# Altium PCB pcb.PcbDoc
Units mm, origin at the board's own origin, x right, y up, seen from the top; angles counter-clockwise.
Board outline 53 x 61 mm, 2 copper layers (Top Layer, Bottom Layer); 50 components, 65 nets, 252 pads, 53 vias.
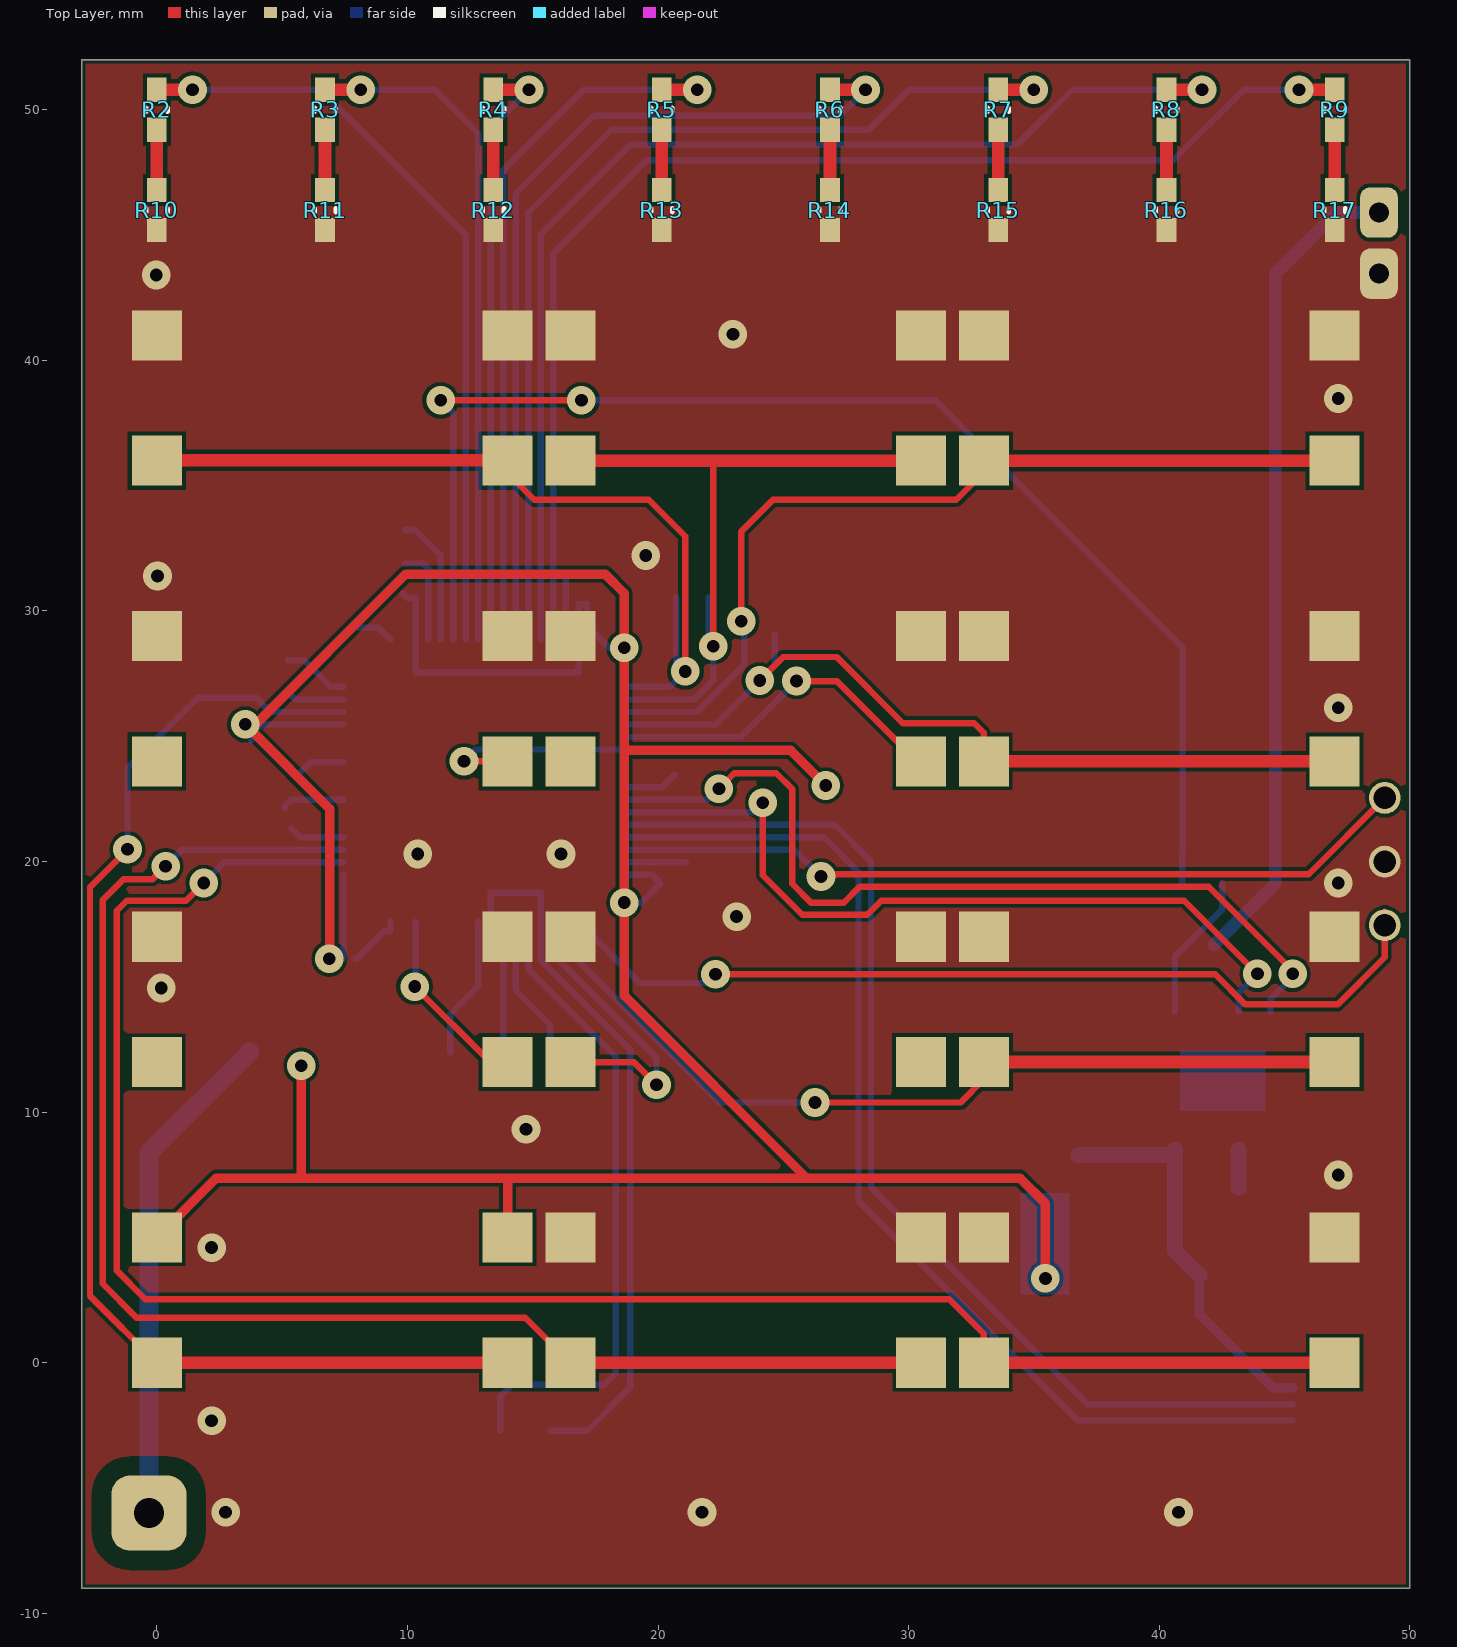
[diagram p0: Top Layer view]
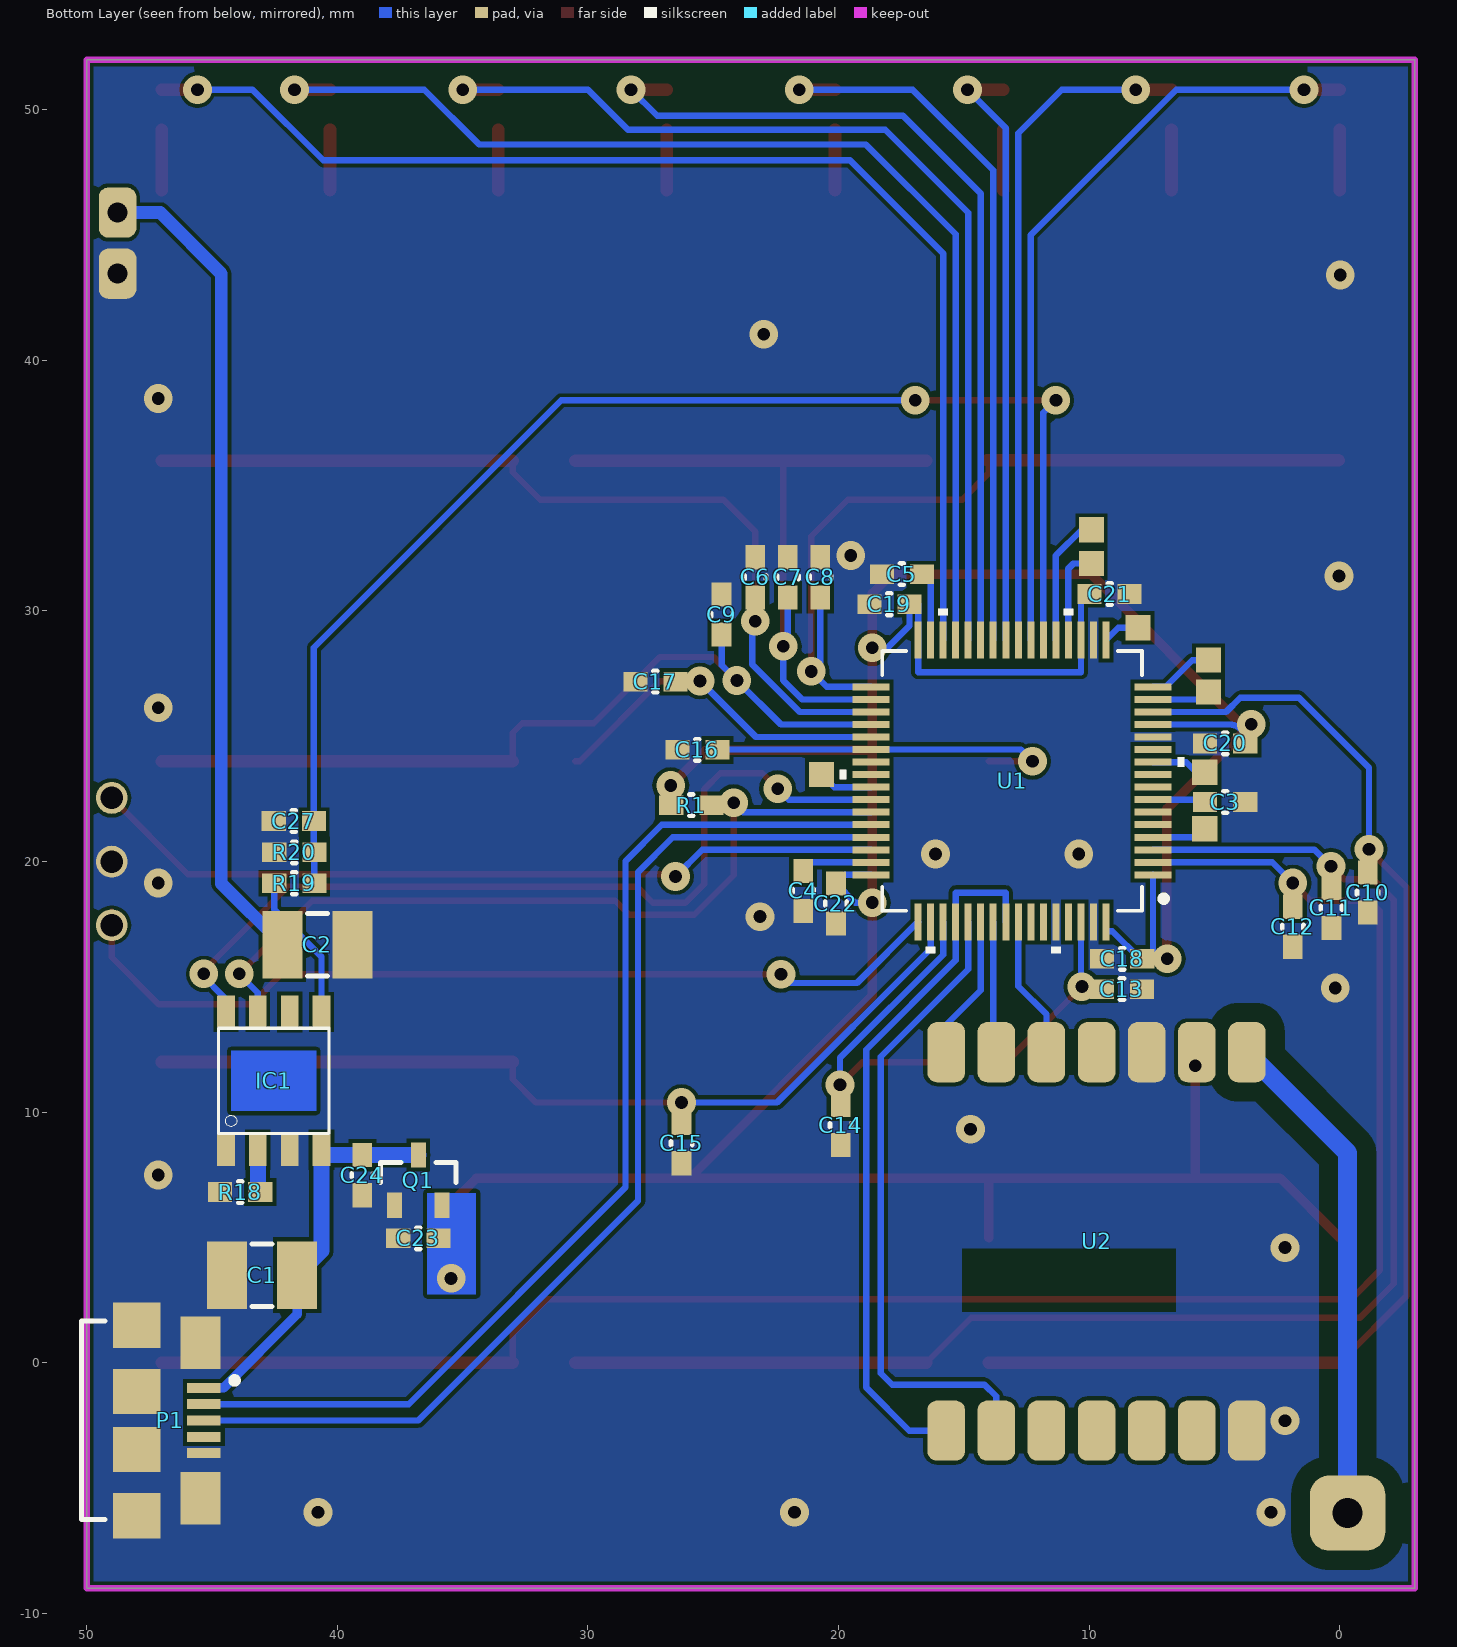
[diagram p1: Bottom Layer view, seen from below]
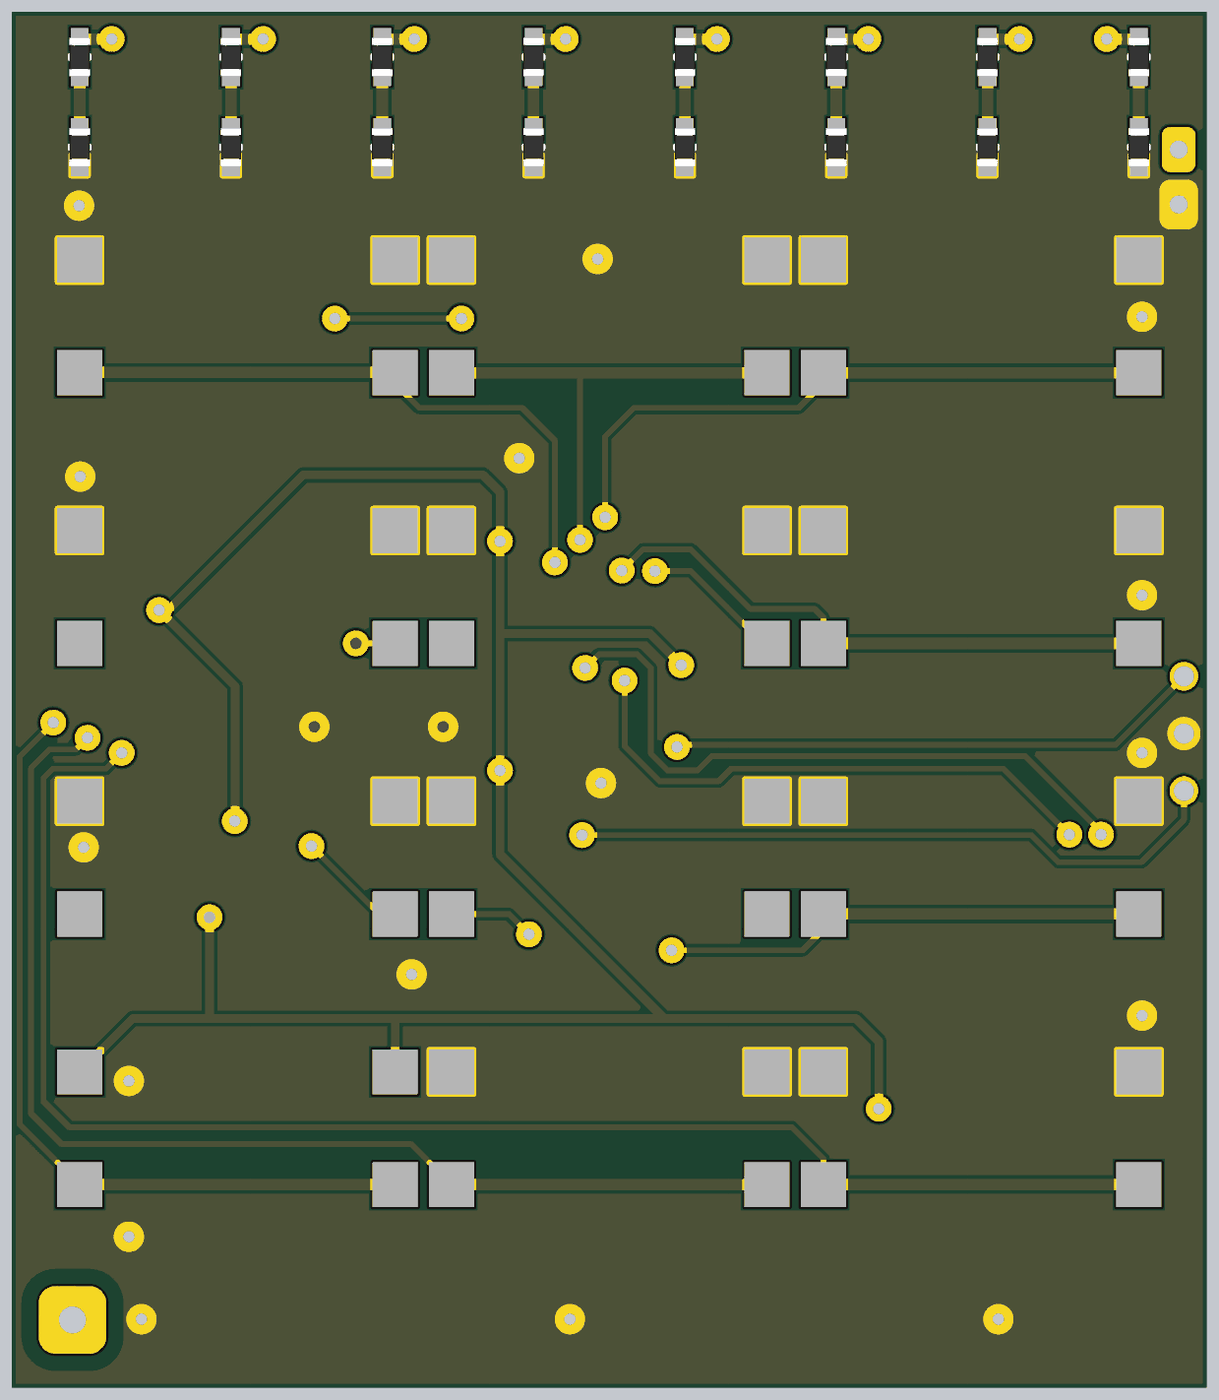
[diagram p2: 3D render of the assembled board from above, using the file's embedded part models]
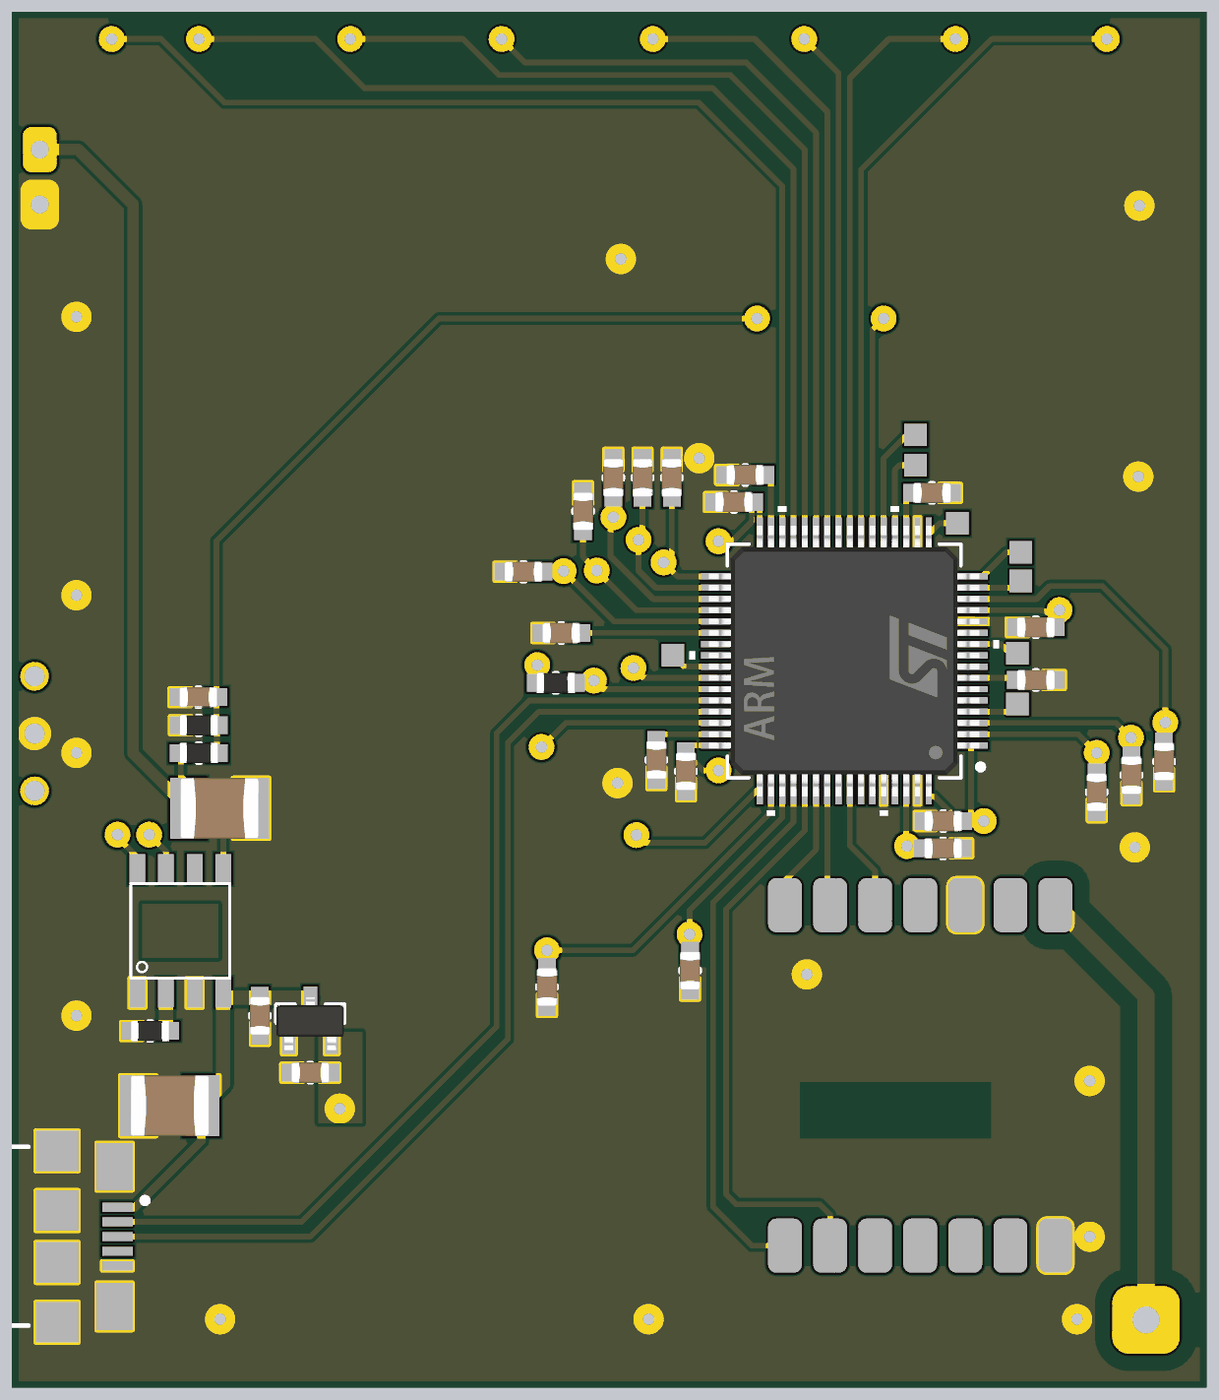
[diagram p3: 3D render of the assembled board from below, using the file's embedded part models]

## Layer stack, top to bottom
Top Solder: solder mask 0.0102, Solder Resist, Dk 3.5
Top Layer: signal copper 0.0356
Dielectric 1: dielectric 0.32, FR-4, Dk 4.8
Bottom Layer: signal copper 0.0356
Bottom Solder: solder mask 0.0102, Solder Resist, Dk 3.5

## Board outline
-3,-9 50,-9 50,52 -3,52

## Design rules (kind name [scope] priority, off if disabled: settings)
Clearance Clearance_1 [InNet('ANT')] p1: gap=0.152 ignorepadtopadclearanceinfootprint=FALSE except(0.762: Arc-Fill Arc-Poly Arc-Region Track-Fill Track-Poly Track-Region SMDPad-Fill SMDPad-Poly SMDPad-Region THPad-Fill THPad-Poly THPad-Region Via-Fill Via-Poly Via-Region Fill-Fill Fill-Poly Fill-Region Poly-Poly Poly-Region Region-Region)
Clearance [All] p2: gap=0.152 ignorepadtopadclearanceinfootprint=FALSE
MinimumSolderMaskSliver [All] p1 off: minsoldermaskwidth=0.254
PolygonConnect [All] p1: connectstyle=Direct reliefconductorwidth=0.254 reliefentries=4 polygonreliefangle="90 Angle" airgapwidth=0.254
RoutingVias [All] p1 off: holewidth=0.711 width=1.27 viastyle="Through Hole" minholewidth=0.711 minwidth=1.27 maxholewidth=0.711 maxwidth=1.27
SilkToSilkClearance [All] p1 off: silktosilkclearance=0.254
SilkToSolderMaskClearance [IsPad] p1 off: minsilkscreentomaskgap=0.254 clearancetoexposedcopper=TRUE
SolderMaskExpansion [All] p1: expansion=0.102
Width [All] p1: maxlimit=12.7 minlimit=0.051 preferedwidth=0.254
27 further rules are at their usual default settings.

## Components (designator, comment, footprint, x,y, rotation, side; value= is the part's Value field where it differs from the comment)
C1 "Cap" RC_1210_T1.8 43,3.5 r180 bottom value=100pF
C2 "Cap" RC_1210_T1.8 40.792,16.688 r0 bottom value=100pF
C3 "Cap" RC_0603 4.571,22.377 r0 bottom value=100pF
C4 "Cap" RC_0603 21.411,18.828 r90 bottom value=100pF
C5 "Cap" RC_0603 17.467,31.468 r180 bottom value=100pF
C6 "Cap" RC_0603 23.317,31.344 r270 bottom value=100pF
C7 "Cap" RC_0603 22.022,31.344 r270 bottom value=100pF
C8 "Cap" RC_0603 20.726,31.344 r270 bottom value=100pF
C9 "Cap" RC_0603 24.663,29.858 r270 bottom value=100pF
C10 "Cap" RC_0603 -1.118,18.763 r90 bottom value=100pF
C11 "Cap" RC_0603 0.33,18.155 r90 bottom value=100pF
C12 "Cap" RC_0603 1.868,17.399 r90 bottom value=100pF
C13 "Cap" RC_0603 8.687,14.91 r0 bottom value=100pF
C14 "Cap" RC_0603 19.914,9.487 r90 bottom value=100pF
C15 "Cap" RC_0603 26.264,8.763 r90 bottom value=100pF
C16 "Cap" RC_0603 25.629,24.46 r180 bottom value=100pF
C17 "Cap" RC_0603 27.305,27.178 r180 bottom value=100pF
C18 "Cap" RC_0603 8.681,16.121 r180 bottom value=100pF
C19 "Cap" RC_0603 17.967,30.269 r180 bottom value=100pF
C20 "Cap" RC_0603 4.571,24.717 r180 bottom value=100pF
C21 "Cap" RC_0603 9.181,30.675 r0 bottom value=100pF
C22 "Cap" RC_0603 20.099,18.328 r90 bottom value=100pF
C23 "Cap" RC_0603 36.766,4.967 r180 bottom value=100pF
C24 "Cap" RC_0603 39,7.487 r90 bottom value=100pF
C27 "Cap" RC_0603 41.732,21.615 r180 bottom value=100pF
IC1 "TP4056" *SOP-8 42.535,11.25 r90 bottom
P1 "Header 6" RR_USB_MICRO_#1 44.65,-2.302 r0 bottom
Q1 "IRLML2502" RR_SOT-23 36.766,7.287 r90 bottom value="MOSFET N-CH 20V 4.2A SOT-23-3"
R1 "Res1" RR_0603 25.873,22.25 r0 bottom value=1K
R2 "Res1" RR_0603 0,50 r90 top value=1K
R3 "Res1" RR_0603 6.714,50 r90 top value=1K
R4 "Res1" RR_0603 13.429,50 r90 top value=1K
R5 "Res1" RR_0603 20.143,50 r90 top value=1K
R6 "Res1" RR_0603 26.857,50 r90 top value=1K
R7 "Res1" RR_0603 33.571,50 r90 top value=1K
R8 "Res1" RR_0603 40.286,50 r90 top value=1K
R9 "Res1" RR_0603 47,50 r90 top value=1K
R10 "Res1" RR_0603 0,46 r90 top value=1K
R11 "Res1" RR_0603 6.714,46 r90 top value=1K
R12 "Res1" RR_0603 13.429,46 r90 top value=1K
R13 "Res1" RR_0603 20.143,46 r90 top value=1K
R14 "Res1" RR_0603 26.857,46 r90 top value=1K
R15 "Res1" RR_0603 33.571,46 r90 top value=1K
R16 "Res1" RR_0603 40.286,46 r90 top value=1K
R17 "Res1" RR_0603 47,46 r90 top value=1K
R18 "Res1" RR_0603 43.875,6.811 r180 bottom value=1K
R19 "Res1" RR_0603 41.712,19.135 r0 bottom value=1K
R20 "Res1" RR_0603 41.712,20.368 r180 bottom value=1K
U1 "STM32F405RGT6" RR_LQFP-64 13.074,23.221 r0 bottom value="IC MCU 32BIT 1MB FLASH 64LQFP"
U2 "RFM12B" RFM12B 9.701,4.844 r90 bottom

## Footprints (in the part's own frame and the unit in brackets; to place one, negate y for a bottom-side part, rotate by r counter-clockwise, add the part's x,y. Pads: shape width x height; smd on the part's side, far side on the other; paste and mask are expansions set on the pad)
*SOP-8 [mm]
  rect 1.3x0.7 smd: 1(-2.75,1.905) 2(-2.75,0.635) 3(-2.75,-0.635) 4(-2.75,-1.905) 5(2.75,-1.905) 6(2.75,-0.635) 7(2.75,0.635) 8(2.75,1.905)
  Top Layer region: -1.2,1.7 1.2,1.7 1.2,-1.7 -1.2,-1.7
  silkscreen extent -2.1,-2.2 2.1,2.2
RC_0603 [mil] "Chip Capacitor"
  rect 38x31 smd: 1(-31.5,0) 2(31.5,0)
  silkscreen extent -3,-17 3,17, body extent -33,-18 33,18, height 35
RC_1210_T1.8 [mm] "Chip Capacitor"
  rect 1.6x2.7 smd: 1(-1.4,0) 2(1.4,0)
  silkscreen extent -0.4,-1.25 0.4,1.25, body extent -1.75,-1.35 1.75,1.35, height 1.8
RFM12B [mm]
  rrect50% 2.4x1.5 smd: 1(-7.55,6) 2(-7.55,4) 3(-7.55,2) 4(-7.55,0) 5(-7.55,-2) 6(-7.55,-4) 7(-7.55,-6) 8(7.55,-6) 9(7.55,-4) 10(7.55,-2) 11(7.55,0) 12(7.55,2) 13(7.55,4) 14(7.55,6)
  Top Layer pour cut-out: -2.8,-3.15 -0.3,-3.15 -0.3,5.35 -2.8,5.35
  body extent -7.95,-8.05 7.95,8.05, height 0.25
RR_0603 [mil] "Chip Resistor; Body 1.6 x 0.8 mm (LxW typ)"
  rect 38x31 smd: 1(-31.5,0) 2(31.5,0)
  silkscreen extent -3,-17 3,17, body extent -33,-18 33,18, height 22
RR_LQFP-64 [mil]
  rect 58x11 smd: 1(-221.5,147.64) 2(-221.5,127.95) 3(-221.5,108.27) 4(-221.5,88.58) 5(-221.5,68.9) 6(-221.5,49.21) 7(-221.5,29.53) 8(-221.5,9.84) 9(-221.5,-9.84) 10(-221.5,-29.53) 11(-221.5,-49.21) 12(-221.5,-68.9) 13(-221.5,-88.58) 14(-221.5,-108.27) 15(-221.5,-127.95) 16(-221.5,-147.64) 33(221.5,-147.64) 34(221.5,-127.95) 35(221.5,-108.27) 36(221.5,-88.58) 37(221.5,-68.9) 38(221.5,-49.21) 39(221.5,-29.53) 40(221.5,-9.84) 41(221.5,9.84) 42(221.5,29.53) 43(221.5,49.21) 44(221.5,68.9) 45(221.5,88.58) 46(221.5,108.27) 47(221.5,127.95) 48(221.5,147.64)
  rect 11x58 smd: 17(-147.64,-221.5) 18(-127.95,-221.5) 19(-108.27,-221.5) 20(-88.58,-221.5) 21(-68.9,-221.5) 22(-49.21,-221.5) 23(-29.53,-221.5) 24(-9.84,-221.5) 25(9.84,-221.5) 26(29.53,-221.5) 27(49.21,-221.5) 28(68.9,-221.5) 29(88.58,-221.5) 30(108.27,-221.5) 31(127.95,-221.5) 32(147.64,-221.5) 49(147.64,221.5) 50(127.95,221.5) 51(108.27,221.5) 52(88.58,221.5) 53(68.9,221.5) 54(49.21,221.5) 55(29.53,221.5) 56(9.84,221.5) 57(-9.84,221.5) 58(-29.53,221.5) 59(-49.21,221.5) 60(-68.9,221.5) 61(-88.58,221.5) 62(-108.27,221.5) 63(-127.95,221.5) 64(-147.64,221.5)
  silkscreen extent -270,-270 270,270, body extent -236,-236 236,236, height 59
RR_SOT-23 [mm] "SOT23, 3-Leads, Body 2.9x1.3mm, Pitch 0.95mm, Lead Span 2.3mm, IPC High Density"
  rect 1x0.6 smd: 1(-1,0.95) 2(-1,-0.95) 3(1,0)
  silkscreen extent -0.1,-1.5 0.7,1.5, body extent -1.33,-1.5 1.27,1.5, height 1.1
RR_USB_MICRO_#1 [mm] "Connector; USB2.0, Type B, SM; 5 Position; Right Angle"
  rect 1.35x0.4 smd: 1(0.675,-1.3) 2(0.675,-0.65) 3(0.675,0) 4(0.675,0.65) 5(0.675,1.3)
  rect 1.6x2.1 smd: 6(0.8,-3.1) 6(0.8,3.1)
  rect 1.9x1.8 smd: 6(3.35,-3.8) 6(3.35,-1.15) 6(3.35,1.15) 6(3.35,3.8)
  silkscreen extent -0.67,-3.98 5.55,3.95, body extent 0.1,-3.95 5.55,3.95, height 3.9

## Part data
C1 C2 C3 C4 C5 C6 C7 C8 C9 C10 C11 C12 C13 C14 C15 C16 C17 C18 C19 C20 C21 C22 C23 C24 C27: "Capacitor", LatestRevisionDate=17-Jul-2002, LatestRevisionNote="Re-released for DXP Platform.", PackageDescription="Radial Cap, Thru-Hole; 2 Leads; 0.3 in Pin Spacing", PackageReference=RAD-0.3, Published=8-Jun-2000, Publisher="Altium Limited"
IC1: Package="Package Analog Devices", Availability=Unavailable, MF="NanJing Top Power ASIC Corp.", MP=TP4056, Price=None, SnapEDA_Link=https://www.snapeda.com/parts/TP4056%20/NanJing%20Top%20Power%20ASIC%20Corp./view-part/?ref=snap
P1: "Header, 6-Pin", LatestRevisionDate=17-Jul-2002, LatestRevisionNote="Re-released for DXP Platform.", Publisher="Altium Limited"
Q1: "MOSFET N-CH 20V 4.2A SOT-23-3", Manufacturer="Infineon Technologies", Package=SOT-23, Cost=0,52, Order Number="IRLML2502GTRPBF ( IRLML6246TRPBF (INFIN))"
R1 R2 R3 R4 R5 R6 R7 R8 R9 R10 R11 R12 R13 R14 R15 R16 R17 R18 R19 R20: "Resistor", LatestRevisionDate=17-Jul-2002, LatestRevisionNote="Re-released for DXP Platform.", PackageDescription="Axial Device, Thru-Hole; 2 Leads; 0.3 in Pin Spacing", PackageReference=AXIAL-0.3, Published=8-Jun-2000, Publisher="Altium Limited"
U1: "MCU STM32F405RGT6", Manufacturer="ST Microelectronics", Package=64-LQFP, Cost=10,58, Order Number=STM32F405RGT6
U2: library part Component_1

## Free pads (board coordinates)
  rect 2x2 smd: 1(14,17) 1(14,29) 1(14,41) 1(30.5,17) 1(30.5,29) 1(30.5,41) 1(47,17) 1(47,29) 1(47,41) 2(14,12) 2(14,24) 2(14,36) 2(30.5,12) 2(30.5,24) 2(30.5,36) 2(47,12) 2(47,24) 2(47,36) 3(14,5) 3(30.5,5) 3(47,5) 4(14,0) 4(30.5,0) 4(47,0) 5(0,0) 5(16.5,0) 5(33,0) 6(0,5) 6(16.5,5) 6(33,5) 7(0,12) 7(0,24) 7(0,36) 7(16.5,12) 7(16.5,24) 7(16.5,36) 7(33,12) 7(33,24) 7(33,36) 8(0,17) 8(0,29) 8(0,41) 8(16.5,17) 8(16.5,29) 8(16.5,41) 8(33,17) 8(33,29) 8(33,41)
  round 1.27 hole 0.9: 1(49,17.46) 1(49,20) 1(49,22.54)
  rrect50% 3x3 hole 1.2: 2(-0.319,-6)
  rect 1x1 smd far side: 7(5.232,26.766) 7(5.232,28.036) 7(5.385,21.311) 7(5.385,23.565) 7(8.052,29.331) 7(9.906,31.897) 7(9.906,33.243) 7(20.676,23.472)
  rrect50% 1.5x2 hole 0.8: 9(48.768,43.459) 9(48.768,45.898)

## Via types
v1: diameter 1.143, hole 0.508, Top Layer to Bottom Layer, 53 vias

## Nets (pads, with @x,y where several pads share a name; then routed paths per layer and width w, separated by ;. In a path a pad name is that pad's centre, name@x,y a point inside that pad or via, vN(x,y) a via of type N, cw(c..) or ccw(c..) an arc to the next point about the centre after c; other vN are vias at no path point)
3V3: C18.2 C19.2 C20.2 C21.2 C22.2 C23.2 pad.3@14,5 pad.6@0,5 Q1.2 R1.2 U1.1 U1.13 U1.19 U1.32 U1.48 U1.64 U2.9 | length 139
  Top Layer w0.381: pad.6@0,5 2.365,7.365 5.764,7.365 ; v1(3.524,25.476) v1@3.731,25.27 ; v1(5.764,11.854) 5.764,7.365 ; v1@6.9,16.139 6.9,22.101 v1@3.731,25.27 ; pad.3@14,5 14,7.344 14.021,7.365 ; v1(26.694,23.038) 25.297,24.435 18.65,24.435 ; v1(35.458,3.367) 35.458,6.353 34.446,7.365 25.934,7.365 ; v1@3.731,25.27 9.931,31.471 17.889,31.471 18.65,30.709 v1(18.65,28.529) 18.65,24.435 ; 5.764,7.365 14.021,7.365 ; 14.021,7.365 25.934,7.365 ; 18.65,24.435 v1(18.65,18.364) 18.65,14.649 25.934,7.365
  Bottom Layer w0.254: C20.2@3.771,24.848 cw(c4.393,24.848) 4.393,25.471 U1.13 ; C18.2@7.448,16.121 U1.1 ; C18.2 7.97,16.121 9.071,17.223 9.312,17.223 9.324,17.235 U1.64 ; C21.2@9.803,30.701 9.981,30.523 10.324,30.523 U1.19 10.324,27.551 16.824,27.551 U1.32 16.824,30.269 C19.2 17.167,29.407 18.045,28.529 v1(18.65,28.529) ; U1.48 19.757,19.471 C22.2 19.328,18.356 v1@18.718,18.356 ; v1@35.75,3.367 v1@35.816,3.433
  other v1: 6.882,16.121
5V: C1.2 C24.2 IC1.4 P1.1 Q1.3 | length 15.9
  Bottom Layer w0.381: C1.2 41.6,1.938 44.541,-1.002 P1.1
  Bottom Layer w0.635: Q1.3 C24.2 40.417,8.287 IC1.4 40.63,4.47 C1.2
ADC7: C27.2 R19.1 R20.2 U1.22 | length 52.9
  Top Layer w0.254: v1(11.324,38.405) v1(16.942,38.405)
  Bottom Layer w0.254: v1(11.324,38.405) 11.824,37.905 U1.22 ; v1(16.942,38.405) 31.064,38.405 40.932,28.537 C27.2 40.932,20.388 R20.2 R19.1
ANT: pad.2@-0.319,-6 U2.8 | length 20.1
  Bottom Layer w0.762: pad.2@-0.319,-6 -0.319,8.373 U2.8
B0: C10.2 pad.4@14,0 pad.5@0,0 U1.14 | length 49.5
  Top Layer w0.254: v1@-1.118,20.523 -2.667,18.974 -2.667,2.667 pad.5@0,0
  Top Layer w0.508: pad.5@0,0 pad.4@14,0
  Bottom Layer w0.254: v1(-1.171,20.49) -1.171,23.747 1.626,26.543 3.962,26.543 4.535,25.971 U1.14
B1: C11.2 pad.4@30.5,0 pad.5@16.5,0 U1.3 | length 59.7
  Top Layer w0.254: v1(0.349,19.817) -0.172,19.296 -1.331,19.296 -2.159,18.468 -2.159,3.15 -0.812,1.803 14.697,1.803 pad.5@16.5,0
  Top Layer w0.508: pad.5@16.5,0 pad.4@30.5,0
  Bottom Layer w0.254: v1(0.349,19.817) 1.003,20.471 U1.3
B2: C12.2 pad.4@47,0 pad.5@33,0 U1.2 | length 75
  Top Layer w0.254: v1(1.868,19.143) 1.165,18.44 -1.194,18.44 -1.6,18.034 -1.6,3.683 -0.457,2.54 31.623,2.54 33,1.163 pad.5@33,0
  Top Layer w0.508: pad.5@33,0 pad.4@47,0
  Bottom Layer w0.254: v1(1.868,19.143) 2.695,19.971 U1.2
B3: C13.2 pad.2@14,12 U1.62 | length 7.6
  Top Layer w0.254: v1(10.287,15.011) 13.298,12 pad.2@14,12
  Bottom Layer w0.254: v1(10.287,15.011) 10.324,15.049 U1.62
B4: C14.2 pad.7@16.5,12 U1.51 | length 12
  Top Layer w0.254: pad.7@16.5,12 19.037,12 v1(19.937,11.1)
  Bottom Layer w0.254: U1.51 15.824,16.281 19.937,12.168 v1(19.937,11.1)
B5: C15.2 pad.2@47,12 pad.7@33,12 U1.50 | length 35.4
  Top Layer w0.254: v1(26.264,10.389) 32.08,10.389 33,11.308 pad.7@33,12
  Top Layer w0.508: pad.7@33,12 pad.2@47,12
  Bottom Layer w0.254: U1.50 16.324,16.518 22.454,10.389 v1(26.264,10.389)
B6: C16.2 pad.2@14,24 U1.38 | length 14.5
  Top Layer w0.254: v1(12.257,24) pad.2@14,24
  Bottom Layer w0.254: v1(12.257,24) 12.727,24.471 U1.38 24.818,24.471 C16.2
B7: C17.2 pad.2@30.5,24 U1.37 | length 14.1
  Top Layer w0.254: v1(25.527,27.203) 27.127,27.203 30.331,24 pad.2@30.5,24
  Bottom Layer w0.254: U1.37 23.294,24.971 v1(25.527,27.203)
B8: C9.2 pad.2@47,24 pad.7@33,24 U1.36 | length 33.9
  Top Layer w0.254: v1(24.054,27.229) 24.989,28.164 27.132,28.164 29.769,25.527 32.614,25.527 33,25.141 pad.7@33,24
  Top Layer w0.508: pad.7@33,24 pad.2@47,24
  Bottom Layer w0.254: U1.36 22.296,25.471 v1(24.054,27.229) 24.663,27.838 C9.2
B9: C8.2 pad.2@14,36 pad.7@0,36 U1.33 | length 33.8
  Top Layer w0.254: pad.2@14,36 14,35.505 15.062,34.442 19.634,34.442 21.089,32.988 v1(21.089,27.589)
  Top Layer w0.508: pad.7@0.051,36.014 pad.2@14.051,36.014
  Bottom Layer w0.254: U1.33 20.47,26.971 v1(21.089,27.589) 20.726,27.952 C8.2
B10: C7.2 pad.2@30.5,36 pad.7@16.5,36 U1.34 | length 28.7
  Top Layer w0.254: v1(22.203,28.59) 22.203,35.908 22.295,36
  Top Layer w0.508: pad.7@16.5,36 22.295,36 pad.2@30.5,36
  Bottom Layer w0.254: U1.34 21.445,26.471 22.203,27.229 v1(22.203,28.59) 22.022,28.771 C7.2
B11: C6.2 pad.2@47,36 pad.7@33,36 U1.35 | length 36
  Top Layer w0.254: v1(23.317,29.591) 23.317,33.172 24.587,34.442 31.902,34.442 33,35.54 pad.7@33,36
  Top Layer w0.508: pad.7@33,36 pad.2@47,36
  Bottom Layer w0.254: U1.35 21.551,25.971 23.444,27.864 23.444,29.464 v1(23.317,29.591)
C\S\: U1.54 U2.14 | length 5.8
  Bottom Layer w0.254: U1.54 14.324,14.864 15.701,13.486 U2.14
CE: IC1.8 U1.42 | length 35.2
  Top Layer w0.254: v1(22.428,22.911) 23.038,23.52 24.722,23.52 25.349,22.894 25.349,19.119 26.104,18.364 27.407,18.364 28.042,18.999 41.97,18.999 v1@45.45,15.519
  Bottom Layer w0.254: U1.42 21.988,22.471 v1(22.428,22.911) ; IC1.8 44.44,14.509 v1@45.45,15.519
  other v1: 45.323,15.519
CHRG: IC1.7 R1.1 U1.43 | length 32.2
  Top Layer w0.254: v1(24.181,22.352) 24.181,19.456 25.756,17.882 28.346,17.882 28.905,18.44 40.996,18.44 v1(43.917,15.519)
  Bottom Layer w0.254: U1.43 23.799,21.971 v1(24.181,22.352) ; IC1.7 43.17,14.773 v1(43.917,15.519)
DM: P1.2 U1.44 | length 43.8
  Bottom Layer w0.254: U1.44 27.046,21.471 28.5,20.017 28.5,7 37.152,-1.652 P1.2
DP: P1.3 U1.45 | length 43.9
  Bottom Layer w0.254: U1.45 26.611,20.971 28,19.581 28,6.465 36.767,-2.302 P1.3
GND: C1.1 C2.1 C3.1 C4.1 C5.1 C6.1 C7.1 C8.1 C9.1 C10.1 C11.1 C12.1 C13.1 C14.1 C15.1 C16.1 C17.1 C18.1 C19.1 C20.1 C21.1 C22.1 C23.1 C24.1 C27.1 IC1.1 IC1.3 P1.5 P1.6 pad.1@14,17 pad.1@14,29 pad.1@14,41 pad.1@30.5,17 pad.1@30.5,29 pad.1@30.5,41 pad.1@47,17 pad.1@47,29 pad.1@47,41 pad.1@49,20 pad.3@30.5,5 pad.3@47,5 pad.6@16.5,5 pad.6@33,5 pad.8 pad.9@48.768,43.459 Q1.1 R10.1 R11.1 R12.1 R13.1 R14.1 R15.1 R16.1 R17.1 R18.1 R20.1 U1.12 U1.18 U1.60 U1.63 U2.7 U2.10
  other v1: 2.743,-5.969 21.755,-5.969 40.767,-5.969 2.184,-2.311 2.184,4.597 47.142,7.493 14.732,9.322 0.178,14.955 23.133,17.805 47.142,19.143 10.414,20.301 16.129,20.301 47.142,26.137 0.025,31.394 19.507,32.211 47.142,38.481 22.987,41.046 -0.025,43.409
I\R\Q\: U1.53 U2.2 | length 25.8
  Bottom Layer w0.254: U2.2 13.701,-1.342 14.172,-0.871 17.855,-0.871 18.312,-0.414 18.312,12.219 14.824,15.707 U1.53
LED0: R2.2 U1.23 | length 30.9
  Top Layer w0.508: R2.2 v1(1.422,50.8)
  Bottom Layer w0.254: v1(1.422,50.8) 6.526,50.8 12.324,45.002 U1.23
LED1: R3.2 U1.24 | length 27
  Top Layer w0.508: R3.2 v1(8.137,50.8)
  Bottom Layer w0.254: v1(8.137,50.8) 11.092,50.8 12.824,49.067 U1.24
LED2: R4.2 U1.25 | length 24
  Top Layer w0.508: R4.2 v1(14.851,50.8)
  Bottom Layer w0.254: U1.25 13.324,49.273 v1(14.851,50.8)
LED3: R5.2 U1.26 | length 29.2
  Top Layer w0.508: R5.2 v1(21.565,50.8)
  Bottom Layer w0.254: U1.26 13.824,47.581 17.043,50.8 v1(21.565,50.8)
LED4: R6.2 U1.27 | length 34.9
  Top Layer w0.508: R6.2 v1(28.28,50.8)
  Bottom Layer w0.254: U1.27 14.324,46.658 17.424,49.759 27.238,49.759 v1(28.28,50.8)
LED5: R7.2 U1.28 | length 40.7
  Top Layer w0.508: R7.2 v1(34.994,50.8)
  Bottom Layer w0.254: U1.28 14.824,45.888 18.136,49.2 28.397,49.2 29.997,50.8 v1(34.994,50.8)
LED6: R8.2 U1.29 | length 46.4
  Top Layer w0.508: R8.2 v1(41.708,50.8)
  Bottom Layer w0.254: U1.29 15.324,45.027 18.913,48.616 34.341,48.616 36.525,50.8 v1(41.708,50.8)
LED7: R9.2 U1.30 | length 49.3
  Top Layer w0.508: v1(45.578,50.8) R9.2
  Bottom Layer w0.254: U1.30 15.824,44.266 19.539,47.981 40.564,47.981 43.383,50.8 v1(45.578,50.8)
MISO: U1.52 U1.56 U2.1 | length 28.3
  Bottom Layer w0.254: U1.56 13.324,18.763 15.324,18.763 U1.52 15.324,16.07 18.896,12.498 18.896,-0.984 17.174,-2.706 U2.1
MOSI: U1.57 U2.12 | length 5.7
  Bottom Layer w0.254: U2.12 11.701,13.905 12.824,15.028 U1.57
NC0: pad.7@5.385,21.311 U1.4 | length 2.2
  Bottom Layer w0.254: pad.7@5.385,21.311 5.725,20.971 U1.4
NC1: U1.5
NC2: U1.6
NC3: U1.8
NC4: U1.9
NC5: pad.7@5.385,23.565 U1.10 | length 1.9
  Bottom Layer w0.254: pad.7@5.701,23.543 6.129,23.971 U1.10
NC6: U1.11
NC7: pad.7@5.232,26.766 U1.15 | length 2.3
  Bottom Layer w0.254: pad.7@5.232,26.766 5.528,26.471 U1.15
NC8: pad.7@5.232,28.036 U1.16 | length 2.7
  Bottom Layer w0.254: pad.7@5.232,28.036 5.878,28.036 6.944,26.971 U1.16
NC9: pad.7@8.052,29.331 U1.17 | length 1.5
  Bottom Layer w0.254: pad.7@8.052,29.331 8.84,29.331 U1.17
NC10: pad.7@9.906,31.897 U1.20 | length 3.9
  Bottom Layer w0.254: pad.7@9.906,31.897 10.625,31.897 10.824,31.697 U1.20
NC11: pad.7@9.906,33.243 U1.21 | length 5.2
  Bottom Layer w0.254: pad.7@9.906,33.243 10.293,33.243 11.324,32.211 U1.21
NetC3_2: C3.2 U1.7 | length 2.5
  Bottom Layer w0.254: C3.2@5.104,22.128 5.104,22.204 5.371,22.471 U1.7
NetC4_2: C4.2 U1.47 | length 2.4
  Bottom Layer w0.254: U1.47 C4.2@21.106,19.971
NetC5_2: C5.2 U1.31 | length 3
  Bottom Layer w0.254: U1.31 16.324,31.468 C5.2
NetIC1_2: IC1.2 R18.2 | length 1.5
  Bottom Layer w0.635: R18.2@43.17,7 IC1.2
NetR2_1: R2.1 R10.2 | length 2.4
  Top Layer w0.508: R10.2 R2.1
NetR3_1: R3.1 R11.2 | length 2.4
  Top Layer w0.508: R11.2 R3.1
NetR4_1: R4.1 R12.2 | length 2.4
  Top Layer w0.508: R12.2 R4.1
NetR5_1: R5.1 R13.2 | length 2.4
  Top Layer w0.508: R13.2 R5.1
NetR6_1: R6.1 R14.2 | length 2.4
  Top Layer w0.508: R14.2 R6.1
NetR7_1: R7.1 R15.2 | length 2.4
  Top Layer w0.508: R15.2 R7.1
NetR8_1: R8.1 R16.2 | length 2.4
  Top Layer w0.508: R16.2 R8.1
NetR9_1: R9.1 R17.2 | length 2.4
  Top Layer w0.508: R17.2 R9.1
SCK: U1.55 U2.13 | length 5.3
  Bottom Layer w0.254: U2.13 13.824,12.516 U1.55
SRV0: pad.7@20.676,23.472 U1.41 | length 2.2
  Bottom Layer w0.254: U1.41 20.174,22.971 pad.7@20.676,23.472
SRV4: U1.58
SRV5: U1.59
SRV6: U1.61
SWCLK: pad.1@49,17.46 U1.49 | length 36.3
  Top Layer w0.254: v1(22.295,15.5) 42.234,15.5 43.434,14.3 47.117,14.3 49,16.183 49,17.46 pad.1@49,18
  Bottom Layer w0.254: U1.49 19.263,15.156 v1@22.284,15.156
SWDIO: pad.1@49,22.54 U1.46 | length 32
  Top Layer w0.254: v1@26.505,19.5 45.96,19.5 pad.1@49,22.54
  Bottom Layer w0.254: U1.46 25.44,20.471 v1(26.505,19.406)
VBAT: C2.2 IC1.5 pad.9@48.768,45.898 R19.2 | length 38.8
  Bottom Layer w0.254: IC1.5 40.63,16.209 42.512,18.09 R19.2
  Bottom Layer w0.508: C2.2 44.628,19.123 44.628,43.459 47.066,45.898 pad.9@48.768,45.898
pads on no net: IC1.6 P1.4 U1.39 U1.40 U2.3 U2.4 U2.5 U2.6 U2.11

## Polygon pours and split planes (outlines as drawn)
GND on Top Layer "Top Layer-GND" (solid, remove dead copper, pour order 2): 50,-9 -3,-9 -3,52 50,52
GND on Bottom Layer "Top Layer-GND" (solid, remove dead copper, pour order 4): 50,-9 -3,-9 -3,52 50,52

## Keep-outs
Bottom Layer:
  the board outline again, w0.254
Keep-Out Layer:
  the board outline again, w0

## Other copper
Bottom Layer:
  region net 3V3: 36.41,6.771 34.455,6.771 34.455,2.724 36.41,2.724

## Text inside footprints (layer, text, board x,y; h text height)
P1: Mechanical 1 "PCB Edge" at 49.875,1.398 h0.25 r90